# EAGLE board astable mul (EAGLE 7.5.0)
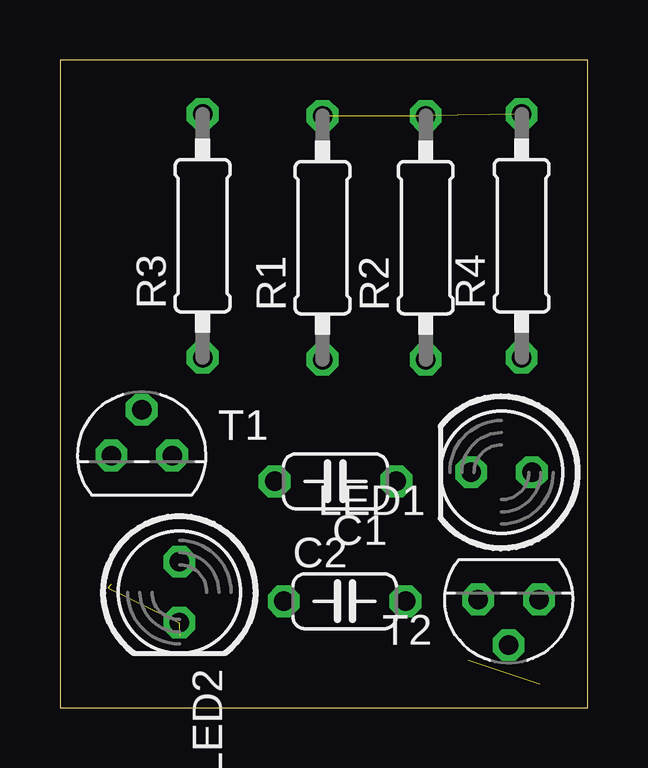
[diagram p0: board, top side]
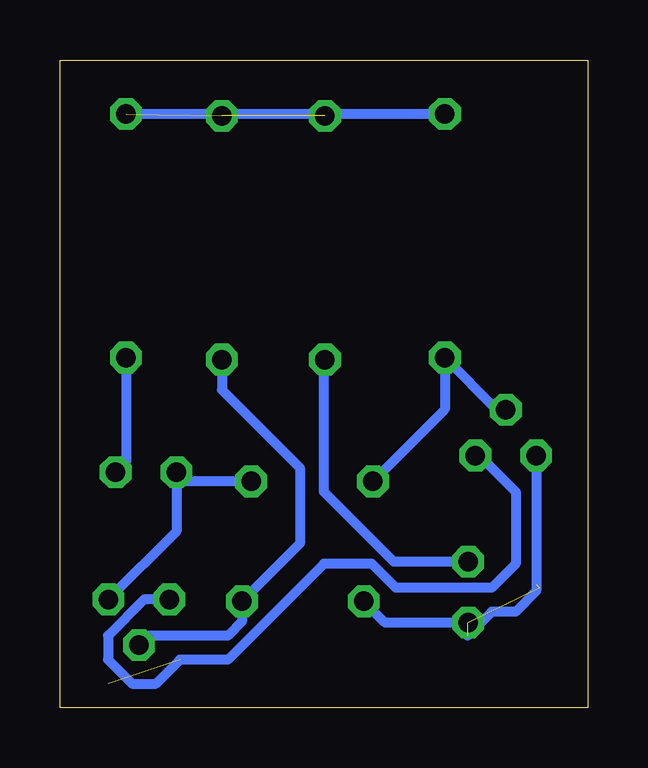
[diagram p1: board, bottom side, seen from below]

Size 22 x 27 mm. Coordinates in mm from the lower left corner, seen from the top.
Outline: 0,0 22,0 22,27 0,27 0,0
Copper layers (1*16): Top 0.035mm / dielectric 1.5mm / Bottom 0.035mm
Design rules "default": minimum track width 10mil, minimum drill 24mil, track to track 8mil, track to pad 8mil, pad to pad 8mil, via to via 8mil, smd to smd 8mil, copper to edge 40mil, drill to drill 8mil, minimum pad ring 10mil, minimum via ring 8mil, stop-mask expansion 4mil, vias tented up to drill 0mil, thermal gap 10mil

## Footprints (pad centres in the part's own frame; a part is rotated, then mirrored left to right if it is on the bottom)
C050-024X044 = drill 0.813 octagon: 1 -2.54,0; 2 2.54,0
LED5MM = drill 0.813 octagon: A -1.27,0; K 1.27,0
0207/10 = drill 0.813 octagon: 1 -5.08,0; 2 5.08,0
TO92 = drill 0.813 octagon: 1 1.27,0; 2 0,1.905; 3 -1.27,0

## Placement (x,y rotation side)
C1  10MF  [C050-024X044]  11.49,9.43 180 top
C2  10MF  [C050-024X044]  11.87,4.43 0 top
LED1  blue  [LED5MM]  18.41,9.81 180 top
LED2  blue  [LED5MM]  4.98,4.81 270 top
R1  470E  [0207/10]  10.95,19.59 90 top
R2  68K  [0207/10]  15.25,19.59 90 top
R3  68K  [0207/10]  5.95,19.67 90 top
R4  470E  [0207/10]  19.25,19.67 90 top
T1  BC547  [TO92]  3.41,10.51 0 top
T2  BC547  [TO92]  18.71,4.51 180 top

## Library data of the parts
C1 C2 R1-R4 = rcl
LED1 LED2 = led
T1 T2 = transistor

## Nets
GND: T1.1 T2.1
N$2: LED2.A R1.1
N$3: C2.1 LED2.K T1.3
N$5: C1.1 LED1.K T2.3
N$6: LED1.A R4.1
N$7: C2.2 R2.1 T2.2
N$8: C1.2 R3.1 T1.2
VCC: R1.2 R2.2 R3.2 R4.2

## Tracks (layer width: path | path; a pad name or v marks a point on that pad's centre or on a via)
GND  (1 unrouted)
  Bottom 0.406: T1.1 4.51,10.51 3,9 3,6 4,5 8,5 9,6 11,6 15,2 17,2 18,1 19,1 20,2 20,3 18.49,4.51 T2.1
N$2
  Bottom 0.406: LED2.A 8.08,6.08 11,9 11,14.46 R1.1
N$3  (3 unrouted)
  Bottom 0.406: LED2.K 8.44,3.54 C2.1 | T1.3 2.14,4.86 3,4 4,4 5,3
N$5
  Bottom 0.406: C1.1 16.76,9.43 LED1.K 17.14,7.35 T2.3
N$6
  Bottom 0.406: R4.1 19.25,10.24 LED1.A
N$7
  Bottom 0.406: R2.1 15.25,13.25 12,10 12,6.84 C2.2 14.41,3.59 15,3 18.32,3 T2.2
N$8
  Bottom 0.406: C1.2 5.95,12.43 R3.1 3.78,12.41 T1.2
VCC  (2 unrouted)
  Bottom 0.406: R3.2 R4.2